# EAGLE board Dazzling Borwo (EAGLE 9.7.0)

Size 84.31 x 133.3 mm. Coordinates in mm from the lower left corner, seen from the top.
Outline: 0,0 84.31,0 84.31,133.3 0,133.3 0,0
Copper layers (1*16): Top 0.035mm / dielectric 1.5mm / Bottom 0.035mm
Design rules "default": minimum track width 6mil, minimum drill 0.35mm, track to track 6mil, track to pad 6mil, pad to pad 6mil, via to via 6mil, smd to smd 6mil, copper to edge 40mil, drill to drill 6mil, minimum pad ring 10mil, minimum via ring 8mil, stop-mask expansion 4mil, vias tented up to drill 0mil, thermal gap 10mil

## Footprints (pad centres in the part's own frame; a part is rotated, then mirrored left to right if it is on the bottom)
LEDRD254W60D565H860B = drill 0.981 pad 1.581: 1 -1.27,0; 2 1.27,0
LEDRD254W60D565H860B_B = drill 0.981 pad 1.581: 1 -1.27,0; 2 1.27,0
LEDRD254W60D565H860B_G = drill 0.981 pad 1.581: 1 -1.27,0; 2 1.27,0
LEDRD254W60D565H860B_Y = drill 0.981 pad 1.581: 1 -1.27,0; 2 1.27,0
PIEZO = drill 1 pad 1.6: 1 -3.5,0; 2 3.5,0
RESAD1016W63L850D250B = drill 0.83 pad 1.43: 1 -5.08,0; 2 5.08,0
SWITCH-MOMENTARY-PTH-6.5MM = drill 1.016 pad 1.88: 1 -3.251,2.261; 2 3.251,2.261; 3 -3.251,-2.261; 4 3.251,-2.261
ARDUINO-UNO-R3-SHIELD = drill 1.016 pad 1.88: 3.3V 24.13,-2.54; 5V 24.13,0; A0 24.13,12.7; A1 24.13,15.24; A2 24.13,17.78; A3 24.13,20.32; A4 24.13,22.86; A5 24.13,25.4; AREF -24.13,-13.97; D2 -24.13,20.32; D3 -24.13,17.78; D4 -24.13,15.24; D5 -24.13,12.7; D6 -24.13,10.16; D7 -24.13,7.62; D8 -24.13,3.81; D9 -24.13,1.27; D10 -24.13,-1.27; D11 -24.13,-3.81; D12 -24.13,-6.35; D13 -24.13,-8.89; GND@0 24.13,2.54; GND@1 24.13,5.08; GND@2 -24.13,-11.43; IOREF 24.13,-7.62; NC 24.13,-10.16; RES 24.13,-5.08; RX -24.13,25.4; SCL -24.13,-19.05; SDA -24.13,-16.51; TX -24.13,22.86; VIN 24.13,7.62

## Placement (x,y rotation side)
D1  RED  [LEDRD254W60D565H860B]  7.6,33.9 180 top
D2  BLUE  [LEDRD254W60D565H860B_B]  27.92,33.9 180 top
D3  GREEN  [LEDRD254W60D565H860B_G]  17.76,33.9 180 top
D4  YELLOW  [LEDRD254W60D565H860B_Y]  38.08,33.9 180 top
PIEZO1  PIEZO  [PIEZO]  68.56,13.58 180 top
R1  220  [RESAD1016W63L850D250B]  26.65,46.6 90 top
R2  220  [RESAD1016W63L850D250B]  16.49,46.6 90 top
R3  220  [RESAD1016W63L850D250B]  36.81,46.6 90 top
R4  220  [RESAD1016W63L850D250B]  6.33,46.6 90 top
S2  SWITCH_MOMENTARY  [SWITCH-MOMENTARY-PTH-6.5MM]  39.35,27.55 90 top
S3  SWITCH_MOMENTARY  [SWITCH-MOMENTARY-PTH-6.5MM]  29.19,27.55 90 top
S6  SWITCH_MOMENTARY  [SWITCH-MOMENTARY-PTH-6.5MM]  19.03,27.55 90 top
S7  SWITCH_MOMENTARY  [SWITCH-MOMENTARY-PTH-6.5MM]  8.87,27.55 90 top
U1  ARDUINO-UNO-R3-SHIELD  [ARDUINO-UNO-R3-SHIELD]  36.43,103.45 90 top

## Library data of the parts
D1 = Tinkercad; CATEGORY: Opto-Electronic; SUB-CATEGORY: LED; VALUE: LED_RED
D2 = Tinkercad; CATEGORY: Opto-Electronic; SUB-CATEGORY: LED; VALUE: LED_BLUE
D3 = Tinkercad; CATEGORY: Opto-Electronic; SUB-CATEGORY: LED; VALUE: LED_GREEN
D4 = Tinkercad; CATEGORY: Opto-Electronic; SUB-CATEGORY: LED; VALUE: LED_YELLOW
PIEZO1 R1-R4 S2 S3 S6 S7 U1 = Tinkercad

## Nets
S2_2: D4.2 R3.1 S2.1 S2.2
S3_2: D2.2 R1.1 S3.1 S3.2
S6_2: D3.2 R2.1 S6.1 S6.2
S7_2: D1.2 R4.1 S7.1 S7.2
U1_D2: D1.1 U1.D2
U1_D3: S7.3 S7.4 U1.D3
U1_D4: D3.1 U1.D4
U1_D5: S6.3 S6.4 U1.D5
U1_D6: D2.1 U1.D6
U1_D7: S3.3 S3.4 U1.D7
U1_D8: D4.1 U1.D8
U1_D9: S2.3 S2.4 U1.D9
U1_D12: PIEZO1.2 U1.D12
U1_GND: PIEZO1.1 R1.2 R2.2 R3.2 R4.2 U1.GND@0 U1.GND@1 U1.GND@2

## Tracks (layer width: path | path; a pad name or v marks a point on that pad's centre or on a via)
S2_2  (3 unrouted)
S3_2  (3 unrouted)
S6_2  (3 unrouted)
S7_2  (3 unrouted)
U1_D2  (1 unrouted)
U1_D3  (2 unrouted)
U1_D4  (1 unrouted)
U1_D5  (2 unrouted)
U1_D6  (1 unrouted)
U1_D7  (2 unrouted)
U1_D8  (1 unrouted)
U1_D9  (2 unrouted)
U1_D12  (1 unrouted)
U1_GND  (7 unrouted)